# Altium PCB USB-RS485.PcbDoc
Units mm, origin at the board's own origin, x right, y up, seen from the top; angles counter-clockwise.
Board outline 39.3 x 15.9 mm, 2 copper layers (Top Layer, Bottom Layer); 32 components, 27 nets, 89 pads, 0 vias.
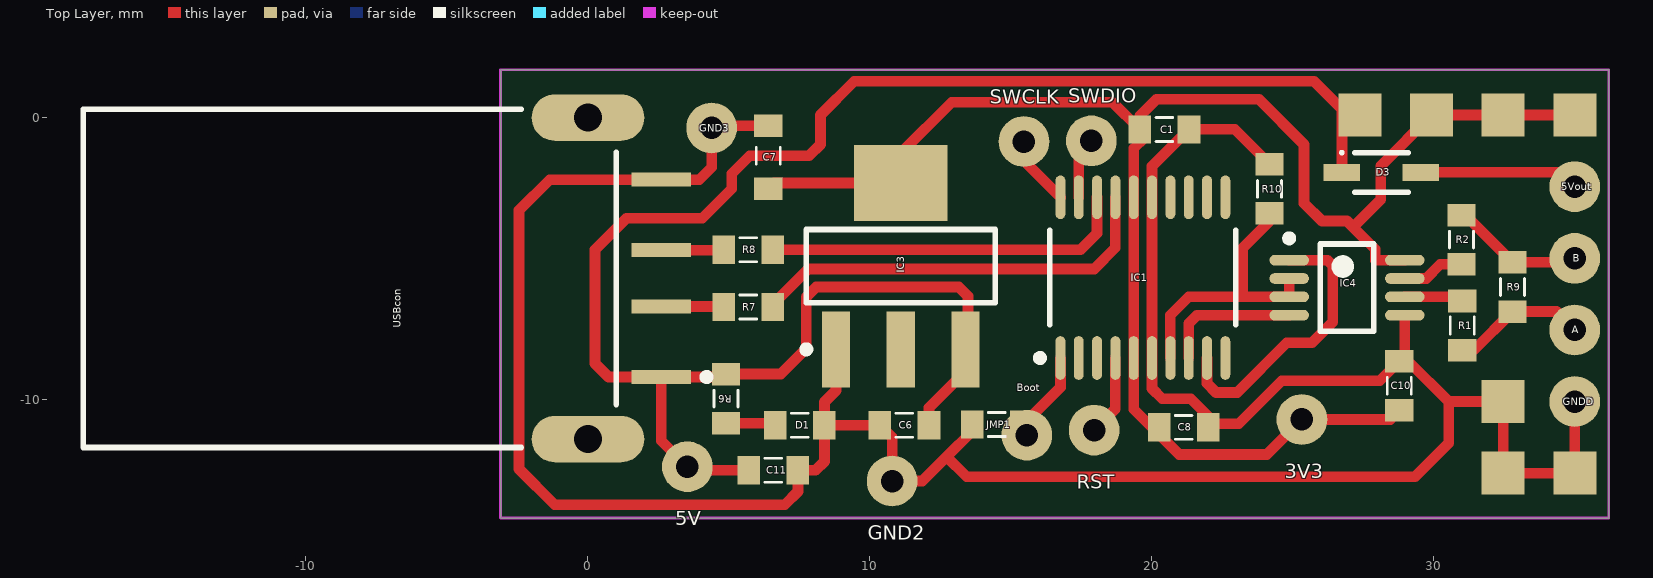
[diagram p0: Top Layer view]
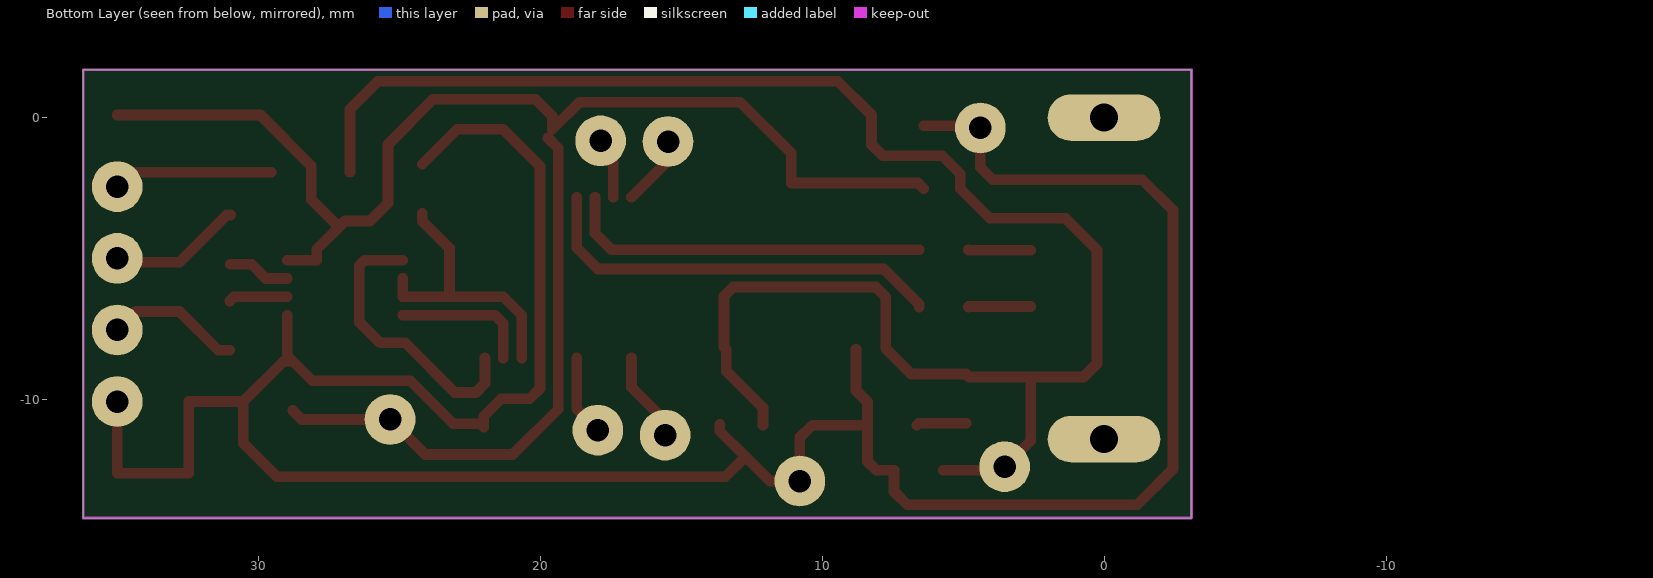
[diagram p1: Bottom Layer view, seen from below]
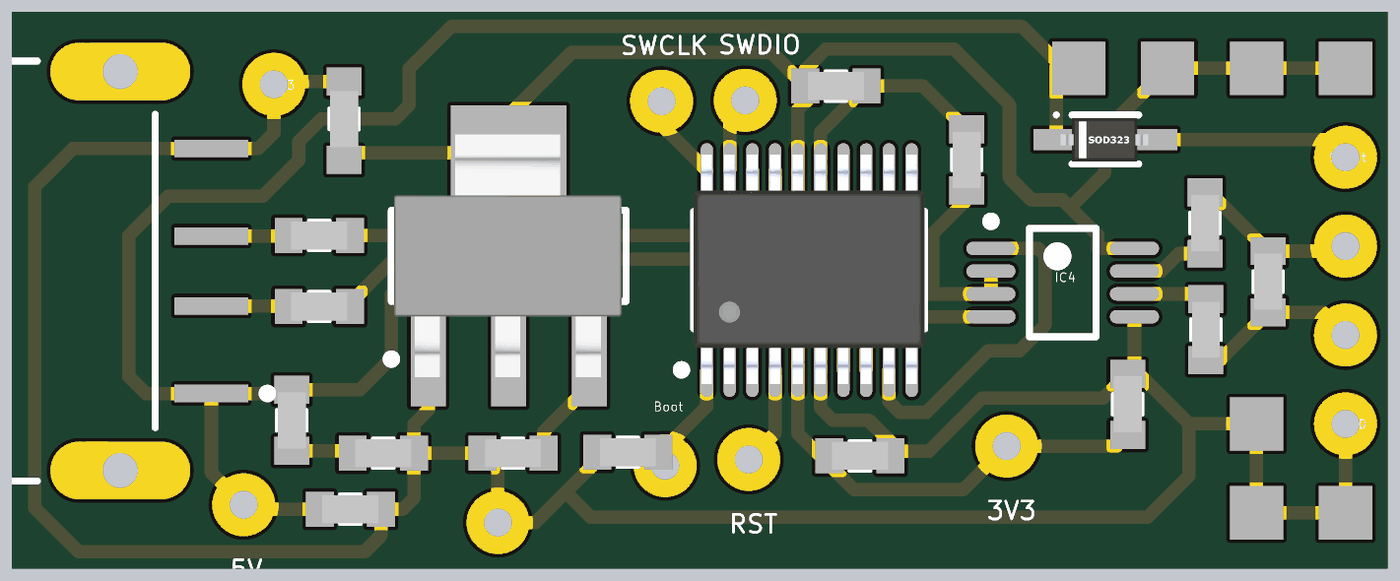
[diagram p2: 3D render of the assembled board from above, using the file's embedded part models]

## Layer stack, top to bottom
Top Solder: solder mask 0.0102, Solder Resist, Dk 3.5
Top Layer: signal copper 0.0356
Dielectric 1: dielectric 0.32, FR-4, Dk 4.8
Bottom Layer: signal copper 0.0356
Bottom Solder: solder mask 0.0102, Solder Resist, Dk 3.5

## Board outline
-3.1,-14.2 -3.1,1.7 36.2,1.7 36.2,-14.2

## Design rules (kind name [scope] priority, off if disabled: settings)
Clearance [All vs InNetClass('rfnets')] p1: gap=2
Clearance ClearanceEdge [All vs OnLayer('Keep-Out Layer')] p2: gap=0.102
Clearance Clearance-all [All] p3: gap=0.254
ComponentClearance [All] p1 off: gap=0.254 collisioncheckmode=3 verticalgap=0.254 showdistances=FALSE
HoleSize [All] p1: absolutevalues=TRUE maxlimit=6 minlimit=0.3 maxpercent=80.000 minpercent=20.000
HoleToHoleClearance [All] p1: gap=0.127 allowstackedmicrovias=TRUE
MinimumAnnularRing [All] p1: minimumring=0.15
MinimumSolderMaskSliver SilkscreenOverComponentPads [All] p2: minsoldermaskwidth=0.254
PolygonConnect [All] p1: connectstyle=Relief reliefconductorwidth=0.7 reliefentries=4 polygonreliefangle="45 Angle" airgapwidth=0.35
RoutingVias [All] p1: holewidth=0.711 width=1.27 viastyle="Through Hole" minholewidth=0.1 minwidth=0.5 maxholewidth=333 maxwidth=333
SolderMaskExpansion [All] p1: expansion=0.102
Width [All] p1: maxlimit=12.7 minlimit=0.203 preferedwidth=0.254
27 further rules are at their usual default settings.

## Components (designator, comment, footprint, x,y, rotation, side; value= is the part's Value field where it differs from the comment)
3V3 "" En_pin_TP 25.316,-10.704 r90 top
5V "" En_pin_TP 3.523,-12.38 r0 top
5Vout "" En_pin_TP 34.994,-2.449 r90 top
A "" En_pin_TP 34.994,-7.529 r90 top
B "" En_pin_TP 34.994,-4.989 r90 top
Boot "" En_pin_TP 15.563,-11.263 r90 top
C1 "" 0603#1 20.439,-0.417 r0 top
C6 "1u" 0603#1 11.219,-10.907 r180 top
C7 "1u" 0603#2 6.393,-1.357 r90 top
C8 "" 0603#1 21.125,-10.983 r0 top
C10 "" 0603#1 28.771,-9.51 r90 top
C11 "" 0603#1 6.571,-12.507 r0 top
D1 "LED3" 0603#1 7.511,-10.907 r0 top
D3 "PMEG2010" SOD323 28.136,-1.941 r0 top
GND2 "" En_pin_TP 10.787,-12.888 r90 top
GND3 "" En_pin_TP 4.387,-0.366 r90 top
GNDD "" En_pin_TP 34.994,-10.069 r90 top
IC1 "STM32F070CxP" TSOP65P640X110_HS-20N 19.677,-5.675 r90 top
IC3 "NCP1117ST33T3" SOT223_M 11.092,-5.268 r90 top
IC4 "SN65HVD72DGKR" DGK8_L 26.916,-6.03 r0 top
JMP1 "Res2" 0603#1 14.496,-10.882 r0 top
R1 "Res2" 0603#1 31.006,-7.376 r90 top
R2 "Res2" 0603#1 30.98,-4.328 r270 top
R6 "Res2" 0603#1 4.895,-9.967 r90 top
R7 "Res2" 0603#1 5.682,-6.716 r180 top
R8 "Res2" 0603#1 5.682,-4.684 r180 top
R9 "Res2" 0603#1 32.784,-6.005 r90 top
R10 "Res2" 0603#1 24.173,-2.525 r90 top
RST "" En_pin_TP 17.95,-11.085 r90 top
SWCLK "" En_pin_TP 15.461,-0.849 r90 top
SWDIO "" En_pin_TP 17.849,-0.823 r90 top
USBcon "1470695-1" 1470695 -2.7,-5.7 r180 top

## Footprints (in the part's own frame and the unit in brackets; to place one, negate y for a bottom-side part, rotate by r counter-clockwise, add the part's x,y. Pads: shape width x height; smd on the part's side, far side on the other; paste and mask are expansions set on the pad)
0603#1 [mm]
  rect 0.8x1 smd paste+0 mask+0.102: 1(-0.873,0) 2(0.873,0)
  silkscreen extent -0.3,-0.43 0.3,0.43, body extent -0.8,-0.4 0.8,0.4, height 0.45
0603#2 [mm]
  rect 0.8x1 smd paste+0 mask+0.102: 1(-1.168,0) 2(1.067,0)
  silkscreen extent -0.3,-0.43 0.3,0.43, body extent -0.8,-0.4 0.8,0.4, height 0.45
1470695 [mm] "Connector; USB1.1, Type A, SM; 4 Position; Right Angle"
  rect 2.1x0.5 smd: 1(-5.3,3.5) 2(-5.3,1) 3(-5.3,-1) 4(-5.3,-3.5)
  oval 4x1.65 hole 1: 5(-2.7,-5.7) 6(-2.7,5.7)
  silkscreen extent -7.02,-6 15.2,6
DGK8_L [mm] "TSOP, 8-Leads, Body 3x3mm, Pitch 0.65mm, IPC High Density"
  oval 1.4x0.381 smd: 1(-2.05,0.975) 2(-2.05,0.325) 3(-2.05,-0.325) 4(-2.05,-0.975) 5(2.05,-0.975) 6(2.05,-0.325) 7(2.05,0.325) 8(2.05,0.975)
  silkscreen extent -2.17,-1.55 0.95,1.87, body extent -1.55,-1.55 1.55,1.55, height 1.1
En_pin_TP [mm]
  round 1.8 hole 0.8: 1(0,0)
SOD323 [mm] "Molded Diode, 2-Leads, Body 1.70x1.25mm, IPC Medium Density"
  rect 1.3x0.6 smd: 1(-1.4,0) 2(1.4,0)
  silkscreen extent -1.45,-0.7 0.95,0.75, body extent -1.28,-0.64 1.22,0.61, height 0.98
SOT223_M [mm] "SOT223, 4-Leads, Body 6.5x3.5mm, Pitch 2.3mm, Lead Span 7mm, IPC Low Density"
  rect 2.7x1 smd: 1(-2.95,2.3) 2(-2.95,0) 3(-2.95,-2.3)
  rect 2.7x3.3 smd: 4(2.95,0)
  silkscreen extent -3.07,-3.35 1.3,3.47, body extent -3.47,-3.22 3.47,3.28, height 1.6
TSOP65P640X110_HS-20N [mm] "TSOP, 20-Leads, Body 6.6x4.5mm (max), Pitch 0.65mm, IPC Medium Density"
  oval 1.55x0.35 smd: 1(-2.85,2.925) 2(-2.85,2.275) 3(-2.85,1.625) 4(-2.85,0.975) 5(-2.85,0.325) 6(-2.85,-0.325) 7(-2.85,-0.975) 8(-2.85,-1.625) 9(-2.85,-2.275) 10(-2.85,-2.925) 11(2.85,-2.925) 12(2.85,-2.275) 13(2.85,-1.625) 14(2.85,-0.975) 15(2.85,-0.325) 16(2.85,0.325) 17(2.85,0.975) 18(2.85,1.625) 19(2.85,2.275) 20(2.85,2.925)
  silkscreen extent -2.97,-3.3 1.68,3.77, body extent -3.25,-3.3 3.3,3.3, height 1.2

## Part data
3V3 5V 5Vout A B Boot GND2 GND3 GNDD RST SWCLK SWDIO: library part En_pin
C1 C6 C7 C8 C10 C11: library part Cap, "Capacitor"
D1: "Typical BLUE SiC LED"
D3: library part "Diode 1N4007", "1 Amp General Purpose Rectifier"
IC3: library part VOLTREG_LD1117S33
IC4: library part SN65HVD20PE4, "Extended Common-mode RS-485 Transceiver, 25 Mbps, 5 V, Half Duplex, -40 to 85 degC, 8-pin PDIP (P), Pb-Free (RoHS)"
JMP1 R1 R2 R6 R7 R8 R9 R10: "Resistor"
USBcon: "USB 1.1, Right Angle, SMT, A Type, Plug, 4 Position, Natural"

## Free pads (board coordinates)
  rect 1.524x1.524 smd: 4(34.994,-12.609) 5(32.454,-10.069) 6(32.454,-12.609) 7(34.994,0.091) 8(32.454,0.091) 9(29.914,0.091) 10(27.374,0.091)

## Nets (pads, with @x,y where several pads share a name; then routed paths per layer and width w, separated by ;. In a path a pad name is that pad's centre, name@x,y a point inside that pad or via, vN(x,y) a via of type N, cw(c..) or ccw(c..) an arc to the next point about the centre after c; other vN are vias at no path point)
+3V3: 3V3.1 C1.1 C7.1 C8.1 C10.1 IC1.5 IC1.16 IC3.4 IC4.8 pad.7 pad.8 pad.9 | length 60.1
  Top Layer w0.381: C7.1 6.6,-2.318 IC3.4 11.092,-1.255 12.896,0.548 18.601,0.548 C1.1 19.566,0.056 20.16,0.65 23.792,0.65 25.392,-0.95 25.392,-3.033 26.027,-3.668 26.916,-3.668 27.132,-3.884 ; C1.1@19.719,-0.722 19.352,-1.088 IC1.16 IC1.5 19.352,-10.338 20.963,-11.948 24.072,-11.948 3V3.1 28.45,-10.704 C10.1 ; IC4.8 27.917,-5.055 27.917,-4.668 27.132,-3.884 ; pad.7 pad.8 pad.9 28.11,-1.712 28.11,-2.906 27.132,-3.884
+5V: 5V.1 C6.1 C11.1 D3.1 IC3.3 pad.10 R6.2 USBcon.1 | length 63.5
  Top Layer w0.381: C11.1 3.65,-12.507 5V.1 2.6,-11.457 USBcon.1 ; C6.1 12.092,-10.288 13.392,-8.988 IC3.3 13.48,-8.131 13.48,-6.335 13.15,-6.005 8.095,-6.005 7.739,-6.36 7.739,-8.189 6.834,-9.094 R6.2 4.789,-9.2 USBcon.1 ; D3.1 26.736,0.297 25.748,1.285 9.441,1.285 8.247,0.091 8.247,-0.95 7.841,-1.357 5.733,-1.357 5.098,-1.992 5.098,-2.525 4.056,-3.566 1.364,-3.566 0.246,-4.684 0.246,-8.723 0.724,-9.2 USBcon.1
Net5Vout_1: 5Vout.1 D3.2 | length 5.7
  Top Layer w0.381: D3.2 34.486,-1.941 5Vout.1
NetA_1: A.1 R1.1 R9.1 | length 4.8
  Top Layer w0.381: R1.1 31.412,-8.25 R9.1 34.343,-6.878 A.1
NetB_1: B.1 R2.1 R9.2 | length 4.8
  Top Layer w0.381: R2.1 31.107,-3.455 R9.2 34.851,-5.132 B.1
NetBoot_1: Boot.1 IC1.1 JMP1.2 | length 3.8
  Top Layer w0.381: Boot.1 15.563,-10.688 JMP1.2 15.436,-10.882 16.752,-9.565 IC1.1
NetD1_1: D1.1 R6.1 | length 1.8
  Top Layer w0.381: R6.1 6.571,-10.84 D1.1
NetIC4_6: IC4.6 R1.2 | length 2.1
  Top Layer w0.381: IC4.6 30.858,-6.355 R1.2
NetIC4_7: IC4.7 R2.2 | length 2.2
  Top Layer w0.381: IC4.7 29.724,-5.705 30.228,-5.201 R2.2
NetR7_2: R7.2 USBcon.2 | length 2.2
  Top Layer w0.381: USBcon.2 4.793,-6.7 R7.2
NetR8_2: R8.2 USBcon.3 | length 2.2
  Top Layer w0.381: USBcon.3 4.793,-4.7 R8.2
PA1: IC1.7 IC4.2 IC4.3 R10.1 | length 10
  Top Layer w0.381: IC1.7 20.652,-7.011 21.308,-6.355 23.208,-6.355 ; R10.1 24.173,-3.668 23.208,-4.633 23.208,-6.355 ; IC4.2 IC4.3 23.208,-6.355
PA2: IC1.8 IC4.4 | length 4.9
  Top Layer w0.381: IC1.8 21.302,-7.301 21.598,-7.005 IC4.4
PA3: IC1.9 IC4.1 | length 10.1
  Top Layer w0.381: IC1.9 21.952,-9.423 22.274,-9.744 23.025,-9.744 24.783,-7.986 25.672,-7.986 26.408,-7.249 26.408,-5.243 26.221,-5.055 IC4.1
PA4: IC1.10
PA5: IC1.11
PA6: IC1.12
PA7: IC1.13
PA9: IC1.17 R7.1 | length 14.9
  Top Layer w0.381: R7.1 6.555,-6.63 7.816,-5.37 17.95,-5.37 18.702,-4.618 IC1.17
PA10: IC1.18 R8.1 | length 13
  Top Layer w0.381: R8.1 17.468,-4.684 18.052,-4.099 IC1.18
PB1: IC1.14
PF0: IC1.2
PF1: IC1.3
RST: IC1.4 RST.1 | length 2.9
  Top Layer w0.381: RST.1 18.702,-10.333 IC1.4
SGND: C1.2 C6.2 C7.2 C8.2 C10.2 C11.2 D1.2 GND2.1 GND3.1 GNDD.1 IC1.6 IC1.15 IC3.1 IC4.5 JMP1.1 pad.4 pad.5 pad.6 R10.2 USBcon.4 | length 101.8
  Top Layer w0.381: C7.2 4.463,-0.29 GND3.1 4.387,-1.763 3.95,-2.2 USBcon.4 -1.359,-2.2 -2.445,-3.286 -2.445,-12.458 -1.178,-13.725 6.979,-13.725 7.444,-13.26 C11.2 8.07,-12.507 8.384,-12.193 D1.2 ; IC3.1 8.792,-9.676 8.384,-10.085 D1.2 ; JMP1.1 13.623,-11.12 12.718,-12.025 ; C8.2 C8.2@21.998,-10.856 ; R10.2 22.938,-0.417 C1.2 20.002,-1.727 IC1.15 IC1.6 20.002,-9.606 20.363,-9.967 21.379,-9.967 21.998,-10.586 C8.2@21.998,-10.856 ; IC4.5 28.966,-8.441 C10.2 ; GNDD.1 pad.4 pad.6 pad.5 30.523,-10.069 ; D1.2 C6.2 10.787,-11.348 GND2.1 11.854,-12.888 12.718,-12.025 ; 12.718,-12.025 13.429,-12.736 29.329,-12.736 30.523,-11.542 30.523,-10.069 ; C8.2@21.998,-10.856 23.081,-10.856 24.605,-9.332 28.075,-9.332 C10.2 ; C10.2 29.091,-8.637 30.523,-10.069
SWCLK: IC1.20 SWCLK.1 | length 2.5
  Top Layer w0.381: SWCLK.1 15.461,-1.533 IC1.20
SWDIO: IC1.19 SWDIO.1 | length 2.2
  Top Layer w0.381: IC1.19 17.402,-1.269 SWDIO.1
pads on no net: IC3.2 USBcon.5 USBcon.6

## Keep-outs
Keep-Out Layer:
  the board outline again, w0.1

## Text inside footprints (layer, text, board x,y; h text height)
USBcon: Mechanical 1 "Mech 2 - Clearance, move to internal plane if present" at -1.7,-12.376 h0.3 r180; Mechanical 1 "Mech 1 - Slot cut-out" at -1.7,-12.876 h0.3 r180; Mechanical 1 "Assign keep-out area to slot" at -1.7,-14.376 h0.3 r180; Mechanical 1 "Slot 1x2.5mm, PTH" at -1.7,-13.376 h0.3 r180; Mechanical 1 "Alert PCB fab to slot details" at -1.7,-13.876 h0.3 r180; Mechanical 1 "PCB Edge" at -3.173,-0.527 h0.25 r270